# Altium PCB DWS-2_Main_Board.PcbDoc
Units mm, origin at the board's own origin, x right, y up, seen from the top; angles counter-clockwise.
Board outline 110 x 123 mm, 2 copper layers (Top Layer, Bottom Layer); 73 components, 72 nets, 311 pads, 74 vias.
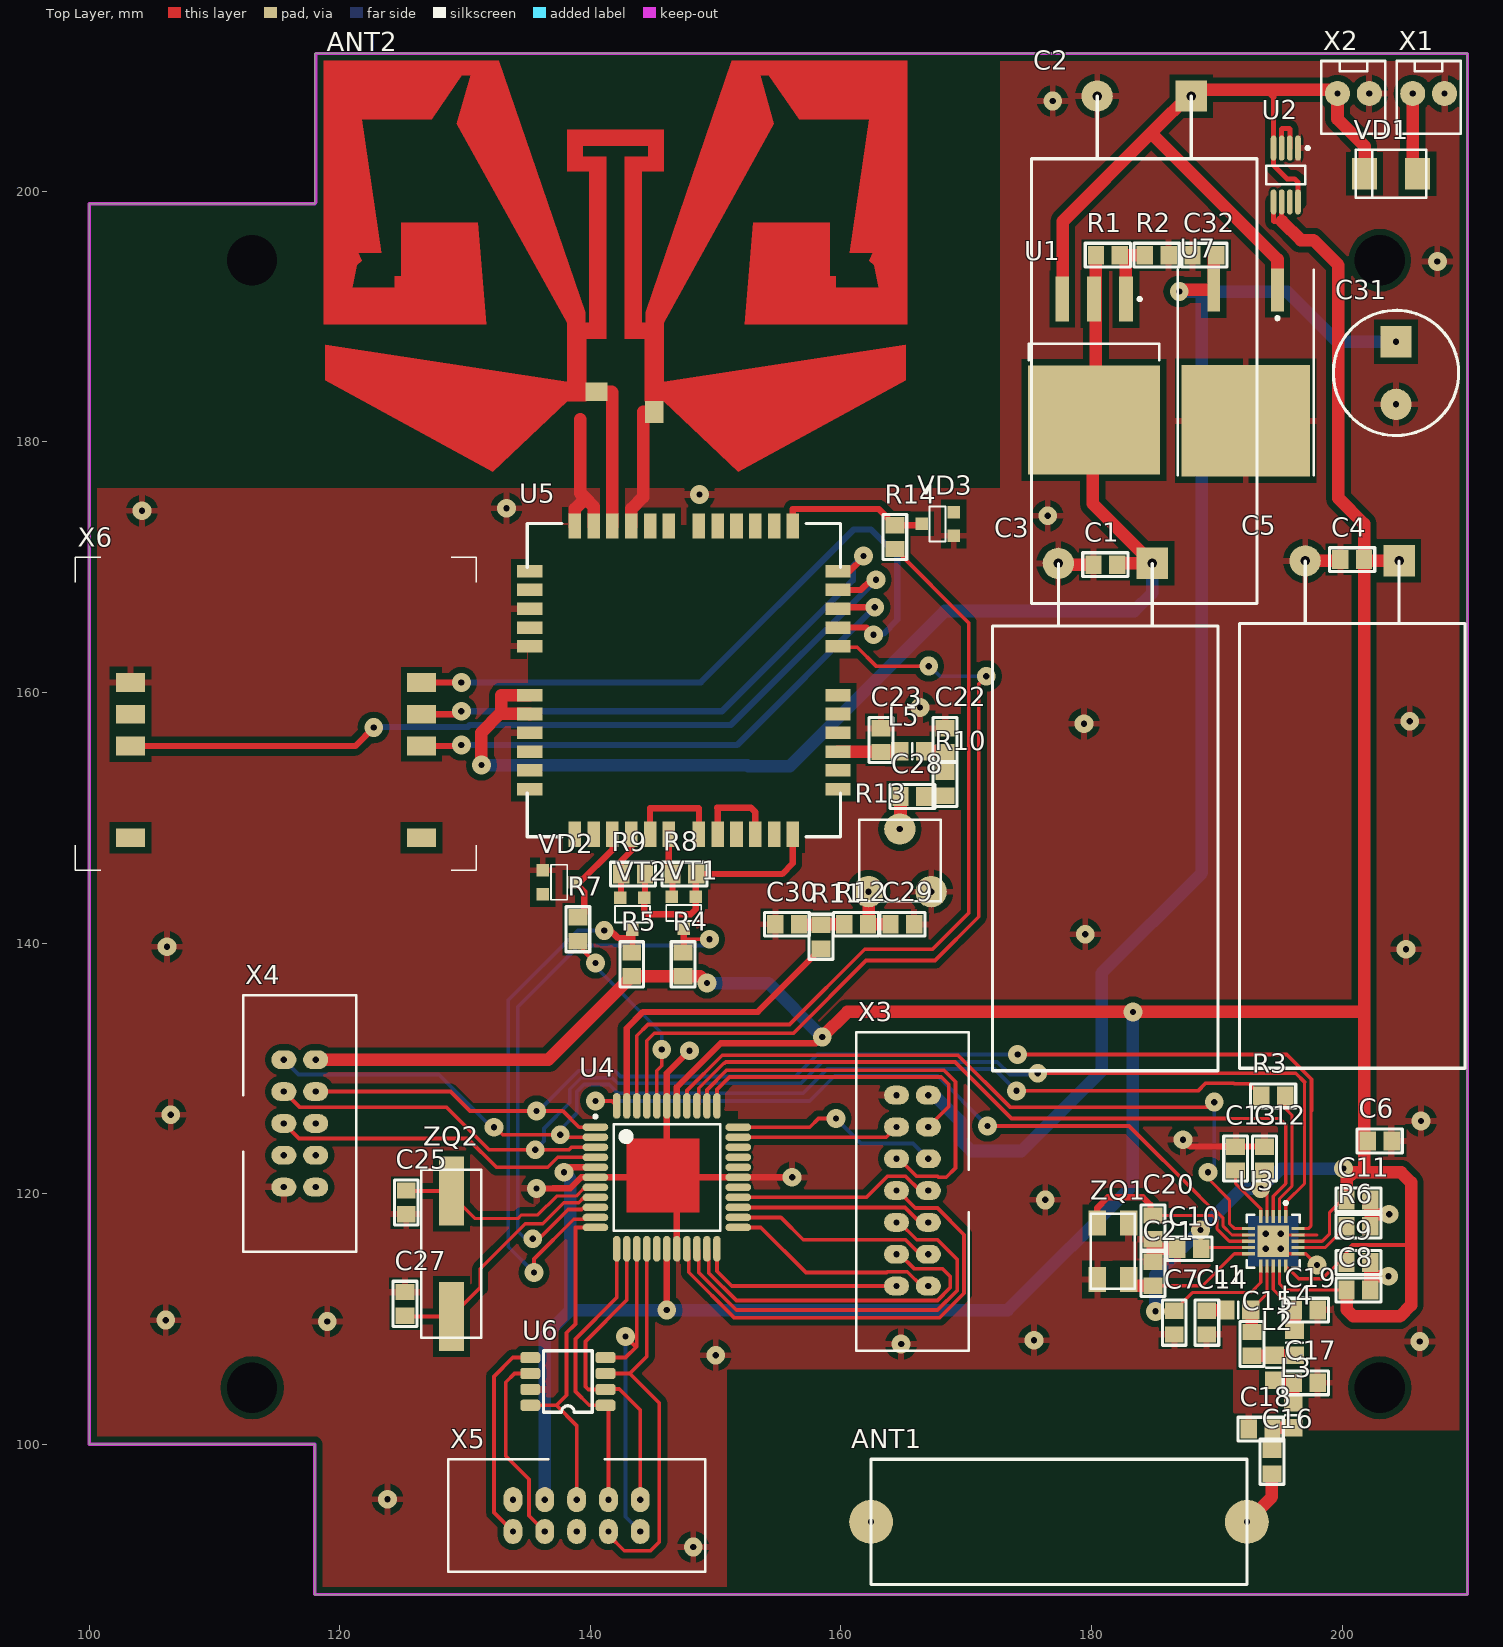
[diagram p0: Top Layer view]
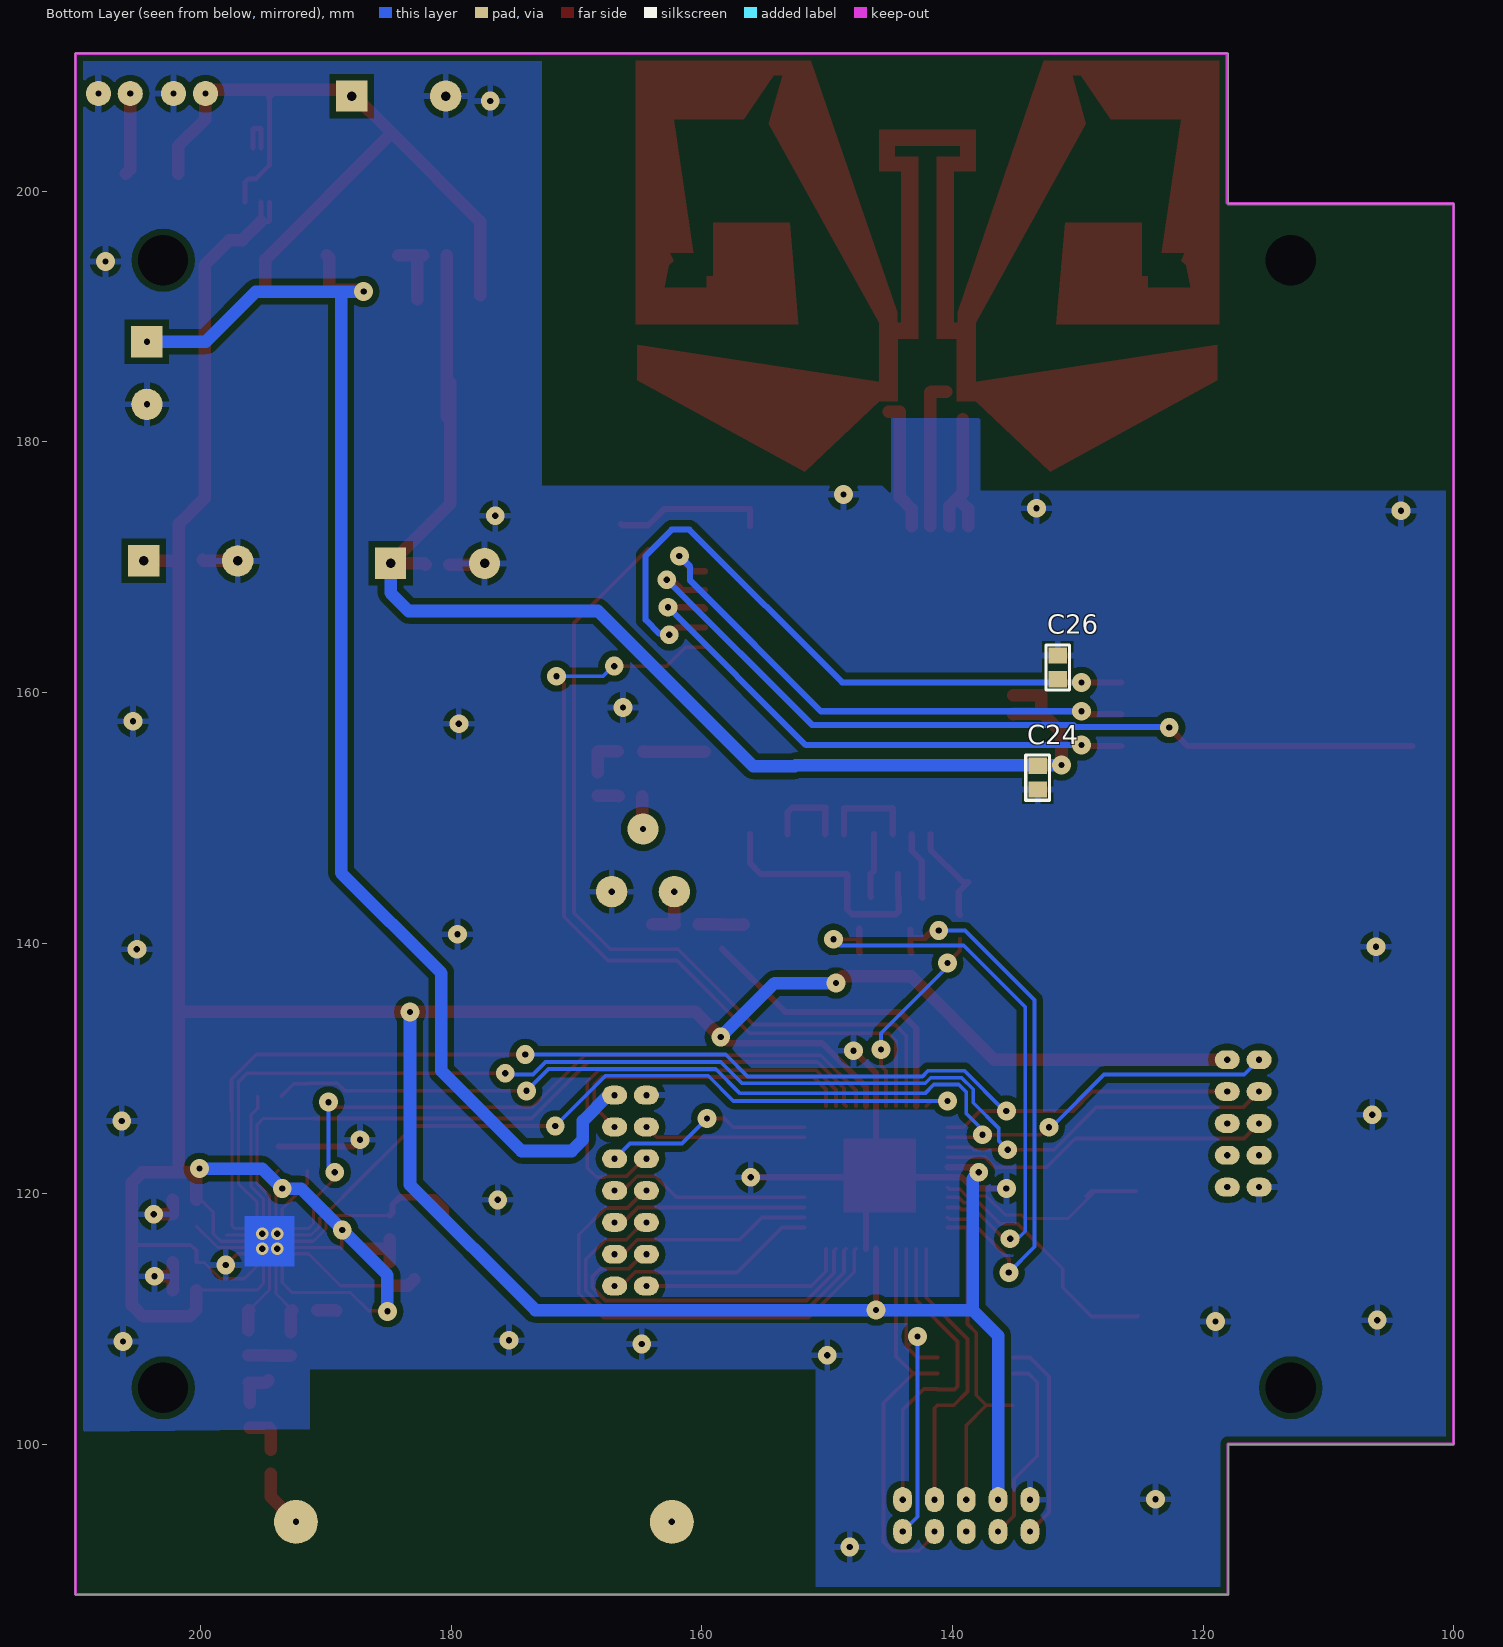
[diagram p1: Bottom Layer view, seen from below]

## Layer stack, top to bottom
Top Layer: signal copper 0.0356
Dielectric: dielectric 0.32, FR-4, Dk 4.8
Bottom Layer: signal copper 0.0356

## Board outline
100,100 100,199 118,199 118,211 210,211 210,88 118,88 118,100 100,100

## Design rules (kind name [scope] priority, off if disabled: settings)
Clearance Clearance_ANT2 [InComponent('ANT2')] p1: gap=0
Clearance "Clearance_GND_VCC +3.3" [InNet('GND') vs InNet('VCC +3.3')] p2 off: gap=0.2
Clearance Clearance_U3_Trace [(IsTrack  And IsNet)  And InRegion(3815,3770 ,4275 ,4280) vs (IsTrack  And IsNet)  And InRegion(3815,3770 ,4275 ,4280)] p3: gap=0.2
Clearance Clearance_QFP_NET [InNet('GND','NetC15_1','NetC19_1','VCC +3.3V','NetR6_2','SPI1_MOSI','SPI1_SCK','NetR3_2','GDO2','NetC13_2','GDO0','SPI_SS','NetC20_1','NetC21_1')  And InRegion(7290,4145 ,7905 ,4900) vs InNet('GND','NetC15_1','NetC19_1','VCC +3.3V','NetR6_2','SPI1_MOSI','SPI1_SCK','NetR3_2','GDO2','NetC13_2','GDO0','SPI_SS','NetC20_1','NetC21_1')  And InRegion(7290,4145 ,7905 ,4900)] p4: gap=0.2
Clearance Clearance_QFP_Pins [InComponent('U3','U4','U2') And IsPad] p5: gap=0.2
Clearance Clearance_GND [InPolygon] p6: gap=0.5
Clearance [All] p7: gap=0.25
ComponentClearance ComponentClearance_R1_C10 [InComponent('C10') vs InComponent('R1')] p1 off: gap=0 collisioncheckmode=3 verticalgap=0 showdistances=FALSE
ComponentClearance [All] p2 off: gap=0.3 collisioncheckmode=3 verticalgap=0.3 showdistances=FALSE
HoleSize [All] p1: absolutevalues=TRUE maxlimit=5 minlimit=0.3 maxpercent=80.000 minpercent=20.000
MinimumSolderMaskSliver [All] p1 off: minsoldermaskwidth=0.254
NetAntennae [All] p1: netantennaetolerance=50
PlaneConnect [All] p1: planeconnectstyle=Relief reliefexpansion=0.508 reliefentries=4 reliefconductorwidth=0.3 reliefairgap=0.3
PolygonConnect [All] p1: connectstyle=Relief reliefconductorwidth=0.5 reliefentries=4 polygonreliefangle="90 Angle"
RoutingCorners [All] p1: cornerstyle=45-Degree minsetback=2.54 maxsetback=5
RoutingVias [All] p1: holewidth=0.5 width=1.6 viastyle="Through Hole" minholewidth=0.3 minwidth=1 maxholewidth=1 maxwidth=2
ShortCircuit ShortCircuit_ANT1 [InComponent('ANT2')] p1: allowed=TRUE
ShortCircuit [All] p2: allowed=FALSE
SilkToSilkClearance [All] p1 off: silktosilkclearance=0.3
SilkscreenOverComponentPads [All] p1 off: minsilkscreentomaskgap=0.254
SolderMaskExpansion [All] p1: expansion=0.102
Width [All] p1: maxlimit=5 minlimit=0.2 preferedwidth=0.3
19 further rules are at their usual default settings.

## Components (designator, comment, footprint, x,y, rotation, side; value= is the part's Value field where it differs from the comment)
ANT1 "SPIRAL_433MHz" ANT_433MHz_SPIRAL 177.4,93.8 r180 top
ANT2 "ANT-GSM900/1800" ANT-GSM 140.5,184 r0 top
C1 "KONDENS_SMD" C0805 181.1,170.2 r180 top
C2 "K50-35" CAP_POL_D18-Horizontal 184.2,207.6 r270 top
C3 "K50-35" CAP_POL_D18-Horizontal 181.1,170.3 r270 top
C4 "KONDENS_SMD" C0805 200.8,170.6 r180 top
C5 "K50-35" CAP_POL_D18-Horizontal 200.8,170.5 r270 top
C6 "KONDENS_SMD" C0805 203,124.2 r180 top
C7 "KONDENS_SMD" C0805 186.6,109.7 r90 top
C8 "KONDENS_SMD" C0805 201.3,112.3 r180 top
C9 "KONDENS_SMD" C0805 201.3,114.5 r180 top
C10 "KONDENS_SMD" C0805 187.8,115.6 r0 top
C11 "KONDENS_SMD" C0805 201.3,119.5 r180 top
C12 "KONDENS_SMD" C0805 193.8,122.8 r270 top
C13 "KONDENS_SMD" C0805 191.5,122.8 r270 top
C14 "KONDENS_SMD" C0805 189.2,109.7 r270 top
C15 "KONDENS_SMD" C0805 192.8,108 r270 top
C16 "KONDENS_SMD" C0805 194.4,98.6 r90 top
C17 "KONDENS_SMD" C0805 197.1,104.9 r0 top
C18 "KONDENS_SMD" C0805 193.5,101.2 r180 top
C19 "KONDENS_SMD" C0805 197.1,110.7 r0 top
C20 "KONDENS_SMD" C0805 184.9,117.3 r270 top
C21 "KONDENS_SMD" C0805 184.9,113.6 r90 top
C22 "KONDENS_SMD" C0805 168.3,156.2 r90 top
C23 "KONDENS_SMD" C0805 163.2,156.2 r90 top
C24 "KONDENS_SMD" C0805 133.2,153.2 r270 bottom
C25 "KONDENS_SMD" C0805 125.3,119.3 r90 top
C26 "KONDENS_SMD" C0805 131.6,162 r270 bottom
C27 "KONDENS_SMD" C0805 125.2,111.2 r270 top
C28 "KONDENS_SMD" C0805 165.7,151.7 r180 top
C29 "KONDENS_SMD" C0805 164.9,141.5 r0 top
C30 "KONDENS_SMD" C0805 155.7,141.5 r180 top
C31 "K50-35" CAP_POL_D10 204.3,185.5 r270 top
C32 "KONDENS_SMD" C0805 189,194.9 r180 top
L1 "SMD_0805" 6-0805_M 191.7,110.7 r180 top
L2 "SMD_0805" 6-0805_M 194.6,106.1 r270 top
L3 "SMD_0805" 6-0805_M 196.1,102.3 r270 top
L4 "SMD_0805" 6-0805_M 196.2,108.1 r270 top
L5 "SMD_0805" 6-0805_M 165.7,155.3 r180 top
R1 "RES" C0805 181.3,194.9 r180 top
R2 "RES" C0805 185.2,194.9 r180 top
R3 "RES" C0805 194.5,127.8 r0 top
R4 "RES" C0805 147.4,138.3 r90 top
R5 "RES" C0805 143.3,138.3 r90 top
R6 "RES" C0805 201.3,117.4 r180 top
R7 "RES" C0805 139,141.1 r270 top
R8 "RES" C0805 147.5,145.5 r180 top
R9 "RES" C0805 143.4,145.5 r180 top
R10 "RES" C0805 168.3,152.7 r90 top
R11 "RES" C0805 158.4,140.5 r270 top
R12 "RES" C0805 161.2,141.5 r0 top
R13 "CA6V" CA6V 164.7,146.6 r0 top
R14 "RES" C0805 164.3,172.4 r90 top
U1 "LM1086IS-ADJ/NOPB" TS3B_M 180.2,185.3 r270 top
U2 "LP2986IMM-3.3" MUA08A_M 195.5,201.3 r270 top
U3 "CC1101" VQFN20 194.5,116.2 r270 top
U4 "ATmega164A-AU" 44A_M 146.1,121.3 r0 top
U5 "WISMO 228" WISMO 159.8,152.3 r180 top
U6 "AT45DB081D" SOIC-8 141.2,103.1 r180 top
U7 "L7805CD2T" TO-263 192.3,186.9 r180 top
VD1 "10BQ100" SMB 203.9,201.4 r0 top
VD2 "BZX84C2V7" SOT23 136.2,145.8 r270 top
VD3 "BZX84C2V7" SOT23 169,172.5 r90 top
VT1 "BSS138-SOT23" SOT23 148.4,143.7 r180 top
VT2 "BSS138-SOT23" SOT23 144.3,143.6 r180 top
X1 "WF 02M" "WF 02M" 206.9,207.8 r0 top
X2 "WF 02M" "WF 02M" 200.9,207.8 r0 top
X3 "IDC-14M" IDC-14M 165.7,120.3 r180 top
X4 "IDC-10M" IDC-10M 116.8,125.6 r0 top
X5 "IDC-10M" IDC-10M 138.9,94.3 r270 top
X6 "MOLEX91228-0001" MOLEX91228-0001 126.9,160.8 r180 top
ZQ1 "SMD0603" Quartz_SMD0603 181.7,115.4 r270 top
ZQ2 "HC-49SMD" HC-49SMD 128.9,115.2 r270 top

## Footprints (in the part's own frame and the unit in brackets; to place one, negate y for a bottom-side part, rotate by r counter-clockwise, add the part's x,y. Pads: shape width x height; smd on the part's side, far side on the other; paste and mask are expansions set on the pad)
6-0805_M [mm] "Chip Resistor, Body 2.0x1.2mm, IPC Low Density"
  rect 1.4x1.5 smd: 1(-1,0) 2(1,0)
  silkscreen extent 0,-0.65 0,0.65, body extent -1.07,-0.7 1.07,0.7, height 0.7
44A_M [mm] "Thin QFP, 44-Leads, Body 10x10mm, Pitch 0.8mm, IPC Low Density"
  oval 2.05x0.6 smd: 1(-5.7,4) 2(-5.7,3.2) 3(-5.7,2.4) 4(-5.7,1.6) 5(-5.7,0.8) 6(-5.7,0) 7(-5.7,-0.8) 8(-5.7,-1.6) 9(-5.7,-2.4) 10(-5.7,-3.2) 11(-5.7,-4) 23(5.7,-4) 24(5.7,-3.2) 25(5.7,-2.4) 26(5.7,-1.6) 27(5.7,-0.8) 28(5.7,0) 29(5.7,0.8) 30(5.7,1.6) 31(5.7,2.4) 32(5.7,3.2) 33(5.7,4)
  oval 0.6x2.05 smd: 12(-4,-5.7) 13(-3.2,-5.7) 14(-2.4,-5.7) 15(-1.6,-5.7) 16(-0.8,-5.7) 17(0,-5.7) 18(0.8,-5.7) 19(1.6,-5.7) 20(2.4,-5.7) 21(3.2,-5.7) 22(4,-5.7) 34(4,5.7) 35(3.2,5.7) 36(2.4,5.7) 37(1.6,5.7) 38(0.8,5.7) 39(0,5.7) 40(-0.8,5.7) 41(-1.6,5.7) 42(-2.4,5.7) 43(-3.2,5.7) 44(-4,5.7)
  silkscreen extent -5.82,-4.25 4.25,4.97, body extent -5,-5 5,5, height 1.2
ANT-GSM [mm]
  rect 1.75x1.45 smd: 1(0,0)
  rect 1.45x1.75 smd: 2(4.6,-1.6)
  Top Layer region: -2.35,5.5 -2.35,-0.75 -0.85,-0.75 -0.85,4.25 0.75,4.25 0.75,18.75 -1.1,18.75 -1.1,19.65 1.25,19.65 4.1,19.65 4.1,18.75 2.25,18.75 2.25,4.25 3.85,4.25 3.85,-0.75 5.35,-0.75 5.35,5.5 3.6,5.5 3.6,17.6 5.35,17.6 5.35,17.65 5.35,17.9 5.35,18.85 5.35,19.35 5.35,19.85 5.35,20.9 -2.35,20.9 -2.35,17.6 -0.6,17.6 -0.6,5.5
  Top Layer region: 24.65,0.9 24.65,3.75 5.35,0.8 5.35,-0.75 11.3,-6.4
  Top Layer region: -8.3,-6.4 -2.35,-0.75 -2.35,0.8 -21.65,3.75 -21.65,0.9
  Top Layer region: 24.8,26.4 10.8,26.4 3.9,6.35 3.9,5.5 5.35,5.5 5.55,5.85 14.15,21.4 13.05,25.25 13.75,25.25 16.15,21.75 21.75,21.75 20.2,11.1 22.05,11.1 21.75,10.45 22.15,10.1 22.5,8.3 19.1,8.3 19.1,9.2 18.6,9.2 18.6,13.5 12.5,13.5 11.8,5.4 24.8,5.4
  Top Layer region: -21.8,5.4 -8.8,5.4 -9.5,13.5 -15.6,13.5 -15.6,9.2 -16.1,9.2 -16.1,8.3 -19.5,8.3 -19.15,10.1 -18.75,10.45 -19.05,11.1 -17.2,11.1 -18.75,21.75 -13.15,21.75 -10.75,25.25 -10.05,25.25 -11.15,21.4 -2.55,5.85 -2.35,5.5 -0.9,5.5 -0.9,6.35 -7.8,26.4 -21.8,26.4
ANT_433MHz_SPIRAL [mm]
  round 3.5 hole 0.5: 1(-15,0) 2(15,0)
  silkscreen extent -15,-5 15,5
C0805 [mm]
  rect 1.3x1.5 smd: 1(-0.95,0) 2(0.95,0)
  silkscreen extent -1.8,-0.95 1.8,0.95
CA6V [mm]
  round 2.5 hole 0.5: 1(-2.5,-2.5) 2(2.5,-2.5) 3(0,2.5)
  silkscreen extent -3.25,-3.25 3.25,3.25
CAP_POL_D10 [mm]
  rect 2.5x2.5 hole 0.5: 1(-2.5,0)
  round 2.5 hole 0.5: 2(2.5,0)
  silkscreen extent -5,-5 5,5, body extent -4.96,-4.99 5,4.99, height 20
CAP_POL_D18-Horizontal [mm]
  rect 2.5x2.5 hole 0.762: 1(0,3.75)
  round 2.5 hole 0.762: 2(0,-3.75)
  silkscreen extent 0,-9 40.5,9
HC-49SMD [mm]
  rect 5.5x2 smd: 1(-5,0) 2(5,0)
  silkscreen extent -6.7,-2.4 6.7,2.4, body extent -6.7,-2.4 6.7,2.4, height 4
IDC-10M [mm]
  oval 2x1.5 hole 0.5: 1(-1.27,5.08) 2(1.27,5.08) 3(-1.27,2.54) 4(1.27,2.54) 5(-1.27,0) 6(1.27,0) 7(-1.27,-2.54) 8(1.27,-2.54) 9(-1.27,-5.08) 10(1.27,-5.08)
  silkscreen extent -4.5,-10.25 4.5,10.25
IDC-14M [mm]
  oval 2x1.5 hole 0.5: 1(-1.27,7.68) 2(1.27,7.68) 3(-1.27,5.14) 4(1.27,5.14) 5(-1.27,2.6) 6(1.27,2.6) 7(-1.27,0.06) 8(1.27,0.06) 9(-1.27,-2.48) 10(1.27,-2.48) 11(-1.27,-5.02) 12(1.27,-5.02) 13(-1.27,-7.56) 14(1.27,-7.56)
  silkscreen extent -4.5,-12.58 4.5,12.85
MOLEX91228-0001 [mm]
  rect 2.3x1.5 smd: 1(0.38,0) 2(0.38,2.54) 3(0.38,5.08) 4(23.6,0) 5(23.6,2.54) 6(23.6,5.08) 7(23.6,12.4) 8(0.38,12.4)
  silkscreen extent -4,-10 28,15
MUA08A_M [mm] "TSOP, 8-Leads, Body 3x3mm, Pitch 0.65mm, IPC Low Density"
  oval 2x0.45 smd: 1(-2.15,0.975) 2(-2.15,0.325) 3(-2.15,-0.325) 4(-2.15,-0.975) 5(2.15,-0.975) 6(2.15,-0.325) 7(2.15,0.325) 8(2.15,0.975)
  silkscreen extent -2.27,-1.55 0.75,1.88, body extent -1.6,-1.6 1.6,1.6, height 1.09
Quartz_SMD0603 [mm]
  rect 2x1.4 smd: 1(-2.25,-1.25) 2(2.25,-1.25) 3(2.25,1.25) 4(-2.25,1.25)
  silkscreen extent -3,-1.75 3,1.75
SMB [mm]
  rect 2x2.5 smd: 1(-2.1,0) 2(2.1,0)
  silkscreen extent -2.8,-1.9 2.8,1.9
SOIC-8 [mm]
  rrect50% 1.6x0.9 smd: 1(0,0) 2(0,-1.27) 3(0,-2.54) 4(0,-3.81) 5(6,-3.81) 6(6,-2.54) 7(6,-1.27) 8(6,0)
  silkscreen extent 1.05,-4.36 4.95,0.55
SOT23 [mm]
  rect 1x1 smd: 1(0,0) 2(1.9,0) 3(0.95,2.55)
  silkscreen extent -0.45,0.65 2.35,1.95
TO-263 [mm] "D2-PAK/TO-263-AB; 3 Leads (1 Cropped); Body 15.9 (inc. leads) x 10.4 mm (LxW max)"
  rect 1x3.4 smd: 1(-2.54,-5.225) 3(2.54,-5.225)
  rect 10.25x8.9 smd: 4(0,5.225)
  silkscreen extent -5.43,-6.83 5.43,9.57
TS3B_M [mm] "D2-PAK, 4-Leads, Body 8.6x10.2mm, Pitch 2.54mm, Lead Span 14.2mm, IPC Low Density"
  rect 3.6x1.1 smd: 1(-6.1,2.54) 2(-6.1,0) 3(-6.1,-2.54)
  rect 8.7x10.55 smd: 4(3.55,0)
  silkscreen extent -6.22,-5.2 -1.2,5.2, body extent -2.55,-5.2 6.34,5.2, height 4.64
VQFN20 [mm] "QFN, 20-Leads, Body 4,2x4,2mm (max), Pitch 0,50mm, IPC Low Density"
  rect 1.05x0.25 smd: 1(-1.975,1) 2(-1.975,0.5) 3(-1.975,0) 4(-1.975,-0.5) 5(-1.975,-1) 11(1.975,-1) 12(1.975,-0.5) 13(1.975,0) 14(1.975,0.5) 15(1.975,1)
  rect 0.25x1.05 smd: 6(-1,-1.975) 7(-0.5,-1.975) 8(0,-1.975) 9(0.5,-1.975) 10(1,-1.975) 16(1,1.975) 17(0.5,1.975) 18(0,1.975) 19(-0.5,1.975) 20(-1,1.975)
  rect 2.5x2.5 smd: 21(0,0)
  silkscreen extent -3.17,-2.1 2.1,2.1, body extent -2.07,-2.07 2.07,2.07, height 0.8
"WF 02M" [mm]
  round 2 hole 0.5: 1(-1.27,0) 2(1.27,0)
  silkscreen extent -2.56,-3.2 2.56,2.6
WISMO [mm]
  rect 2x1 smd: 1(0.04,0.02) 2(0.04,-1.48) 3(0.04,-2.98) 4(0.04,-4.48) 5(0.04,-5.98) 6(0.04,-7.48) 7(0.04,-11.38) 8(0.04,-12.88) 9(0.04,-14.38) 10(0.04,-15.88) 11(0.04,-17.38) 24(24.64,-17.38) 25(24.64,-15.88) 26(24.64,-14.38) 27(24.64,-12.88) 28(24.64,-11.38) 29(24.64,-7.48) 30(24.64,-5.98) 31(24.64,-4.48) 32(24.64,-2.98) 33(24.64,-1.48) 34(24.64,0.02)
  rect 1x2 smd: 12(3.64,-20.98) 13(5.14,-20.98) 14(6.64,-20.98) 15(8.14,-20.98) 16(9.64,-20.98) 17(11.14,-20.98) 18(13.54,-20.98) 19(15.04,-20.98) 20(16.54,-20.98) 21(18.04,-20.98) 22(19.54,-20.98) 23(21.04,-20.98) 35(21.04,3.62) 36(19.54,3.62) 37(18.04,3.62) 38(16.54,3.62) 39(15.04,3.62) 40(13.54,3.62) 41(11.14,3.62) 42(9.64,3.62) 43(8.14,3.62) 44(6.64,3.62) 45(5.14,3.62) 46(3.64,3.62)
  silkscreen extent -0.16,-21.18 24.84,3.82, body extent -0.1,-21.2 24.8,3.8, height 2.8

## Part data
ANT1: library part ANT_433MHz_SPIRAL
C2 C3 C5: library part "Capasitor _pol D18"
C31: library part "Capasitor_pol D10"
L1 L2 L3 L4 L5: library part Induktor_0805
R1 R2 R3 R4 R5 R6 R7 R8 R9 R10 R11 R12 R14: "Resistor"
R13: library part Resistor_podstr
U1: "1.5A Low Dropout Positive Regulators, 3-pin TO-263, Pb-Free"
U2: "Micropower, 200 mA Ultra Low-Dropout Fixed or Adjustable Voltage Regulator, 8-pin Mini SOIC"
U4: "8-bit AVR Microcontroller, 16KB Flash, 512 Bytes EEPROM, 1KB SRAM, 44-pin TQFP, Industrial Grade (-40°C to 85°C)"
U7: "Positive Voltage Regulator"
ZQ1: library part Quartz_SMD0603

## Free pads (board coordinates)
  round 0 hole 4 unplated: 0(113,104.5) 1(113,194.5) 2(203,194.5) 3(203,104.5)

## Via types
v1: diameter 1.5, hole 0.5, Top Layer to Bottom Layer, 70 vias
v2: diameter 1, hole 0.5, Top Layer to Bottom Layer, tented top, 4 vias

## Nets (pads, with @x,y where several pads share a name; then routed paths per layer and width w, separated by ;. In a path a pad name is that pad's centre, name@x,y a point inside that pad or via, vN(x,y) a via of type N, cw(c..) or ccw(c..) an arc to the next point about the centre after c; other vN are vias at no path point)
DS: U4.35 X3.10 | length 34.7
  Top Layer w0.3: U4.35 149.3,128.278 150.872,129.85 168.228,129.85 169.15,128.928 169.15,122.05 168.4,121.3 167.786,121.3 167.696,121.39 166.024,121.39 164.634,122.78 X3.10
GDO0: U3.6 U4.37 | length 58.9
  Top Layer w0.25: v1(189.3,121.7) 189.3,121.2 191,119.5 191,117.614 191.414,117.2 U3.6
  Top Layer w0.3: U4.37 147.7,128.233 150.517,131.05 169.35,131.05 173.5,126.9 189.8,126.9 v1(189.8,127.3)
  Bottom Layer w0.3: v1(189.3,121.7) 189.8,122.2 v1(189.8,127.3)
GDO2: U3.3 U4.36 | length 59
  Top Layer w0.25: 191,126 195,126 195.5,125.5 195.5,120.8 194.5,119.8 U3.3
  Top Layer w0.3: U4.36 148.65,127.15 148.65,128.406 150.644,130.4 150.7,130.4 150.8,130.5 169.1,130.5 173.6,126 191,126
GND: ANT2.2 C1.2 C2.2 C3.2 C4.2 C5.2 C6.1 C7.1 C8.1 C9.1 C10.1 C11.1 C12.1 C13.1 C14.2 C17.2 C18.2 C19.2 C20.2 C21.2 C22.2 C23.2 C24.2 C25.1 C26.1 C27.1 C29.2 C30.2 C31.2 C32.2 R2.1 R6.1 R13.2 U2.1 U3.16 U3.19 U3.21 U4.6 U4.18 U4.28 U4.39 U5.20 U5.22 U5.23 U5.26 U5.28 U5.31 U6.7 U7.4 VD2.1 VD3.1 X1.2 X2.2 X3.14 X4.9 X5.9 X6.4 ZQ1.2 ZQ1.4 | length 88.2
  Top Layer w0.25: v2(195.1,115.6) 195.5,115.2 U3.16 197.1,115.2 v1(198,114.3) ; v2(195.1,116.8) 195.2,116.7 U3.19 198,116.7
  Top Layer w0.5: v1(135.7,120.4) 137.016,120.4 137.041,120.425 138.393,120.425 139.268,121.3 U4.6 146.1,121.3 ; U4.18 146.9,121.3 ; v1(147.9,131.4) 146.1,129.6 U4.39 146.1,121.3 ; v1(156.1,121.3) U4.28 146.9,121.3 ; v1(187.3,124.3) 187.85,123.75 C13.1 C12.1 ; 146.1,121.3 146.9,121.3
  Top Layer w1: U5.23 138.76,174.66 139.6,175.5 ; 139.2,181.8 139.2,175.9 139.6,175.5 ; U5.22 140.26,174.84 139.6,175.5 ; U5.20 143.26,174.66 144.2,175.6 144.2,182.4 ANT2.2 ; C3.2 177.45,170.2 C1.2 ; C21.2 184.9,115.6 ; C20.2 184.9,115.6 ; C10.1 184.9,115.6 ; C5.2 199.75,170.5 C4.2 ; C8.1@202.2,112.35 C8.1 202.25,113.4 ; C9.1 202.25,113.4 ; C11.1 202.25,118.35 v1(203.75,118.35) ; v1(203.7,113.4) 202.25,113.4
  other v1: 148.2,91.8 123.8,95.6 150,107.1 164.8,108 206.2,108.2 175.4,108.3 119,109.8 106.1,109.9 176.3,119.5 206.3,125.8 106.5,126.3 205.1,139.5 106.2,139.7 179.5,140.7 179.4,157.5 205.4,157.7 166.3,158.8 176.5,174.1 104.2,174.5 133.3,174.7 148.7,175.8 207.6,194.4 176.9,207.2
  other v2: 193.9,115.6 193.9,116.8
MEM_CS: U4.14 U6.4 X5.2 | length 28
  Top Layer w0.3: U6.4 142.81,106.91 143.7,107.8 ; v1(142.8,108.6) 143.6,107.8 143.7,107.8 ; U4.14 143.7,107.8
  Bottom Layer w0.3: v1(142.8,108.6) 142.8,94.21 X5.2
MEM_RES: U4.15 U6.3 X5.4 | length 32
  Top Layer w0.3: U6.3 143.14,105.64 ; X5.4 141.44,92.76 142.7,91.5 144.8,91.5 145.5,92.2 145.5,103.28 143.14,105.64 ; U4.15 144.5,107 143.14,105.64
NetANT1_1: ANT1.1 C16.1 | length 4.7
  Top Layer w1: ANT1.1 194.4,95.8 C16.1
NetANT2_1: ANT2.1 U5.21 | length 11.9
  Top Layer w1: ANT2.1 141.7,184 141.76,183.94 U5.21
NetC2_1: C2.1 U1.3 U2.4 U2.8 U7.1 VD1.1 X2.1 | length 66.7
  Top Layer w0.4: 194.525,207.525 U2.4 194.525,202.075 195.6,201 196.2,201 196.475,200.725 U2.8
  Top Layer w0.5: 193.95,208.1 194.525,207.525
  Top Layer w1: U1.3@177.7,191.7 177.7,197.6 184.7,204.6 ; U7.1 194.84,194.56 184.8,204.6 184.7,204.6 ; VD1.1 201.8,203.6 199.63,205.77 X2.1 199.33,208.1 193.95,208.1 188.2,208.1 184.7,204.6
NetC13_2: C13.2 U3.5 | length 4.5
  Top Layer w0.25: C13.2 191.5,120.8 193.5,118.8 U3.5
NetC14_1: C14.1 L1.2 | length 1.5
  Top Layer w1: C14.1 189.25,110.7 L1.2
NetC15_1: C15.1 L1.1 U3.12 | length 5.9
  Top Layer w0.25: L1.1 194,112 U3.12
  Top Layer w1: L1.1 192.8,110.6 C15.1
NetC15_2: C15.2 L2.1 L4.2 | length 3.4
  Top Layer w1: C15.2 194.55,107.05 L2.1 L4.2
NetC16_2: C16.2 C18.1 L3.2 | length 3.4
  Top Layer w1: C16.2 194.4,101.15 C18.1 194.55,101.3 L3.2
NetC17_1: C17.1 L2.2 L3.1 | length 3.3
  Top Layer w1: L2.2 194.8,104.9 C17.1 196.1,104.85 L3.1
NetC19_1: C19.1 L4.1 U3.13 | length 5.8
  Top Layer w0.25: U3.13 194.5,112.35 C19.1
  Top Layer w1: C19.1 196.2,110.65 L4.1
NetC20_1: C20.1 U3.8 ZQ1.1 | length 15.9
  Top Layer w0.25: C20.1 189.65,118.25 190,117.9 190,117.2 191,116.2 U3.8
  Top Layer w0.5: ZQ1.1 180.45,118.85 181.3,119.7 184.1,119.7 184.7,119.1 184.7,118.45 C20.1
NetC21_1: C21.1 U3.10 ZQ1.3 | length 10.8
  Top Layer w0.25: C21.1 188.85,112.65 191.4,115.2 U3.10
  Top Layer w1: ZQ1.3 183.45,112.65 C21.1
NetC23_1: C23.1 L5.2 U5.3 | length 5
  Top Layer w1: U5.3 163.17,155.28 C23.1 164.65,155.25 L5.2
NetC25_2: C25.2 U4.7 ZQ2.1 | length 17.9
  Top Layer w0.25: C25.2 C25.2@125.35,120.2 ; ZQ2.1@128.6,120.2 130.8,118 134.2,118 134.5,118.3 135.8,118.3 137.3,119.8 138.856,119.8 139.406,120.35
  Top Layer w0.3: C25.2@125.35,120.2 128.6,120.2 ZQ2.1 ZQ2.1@129.3,119.8 ; 139.406,120.35 140.25,120.35 U4.7
NetC26_2: C26.2 U5.8 X6.1 | length 54.5
  Top Layer w0.5: X6.1 v1(129.7,160.8) ; U5.8 162.02,165.18 v1(162.6,164.6)
  Bottom Layer w0.5: v1(129.7,160.8) 148.8,160.8 161,173 162.4,173 164.5,170.9 164.5,165.8 163.4,164.7 162.7,164.7 v1(162.6,164.6)
NetC27_2: C27.2 U4.8 ZQ2.2 | length 20
  Top Layer w0.3: C27.2 125.25,110.2 ZQ2.2 131.2,112.5 131.2,114 134.8,117.6 136.2,117.6 137.875,119.275 139.073,119.275 139.498,119.7 U4.8
NetC28_1: C28.1 R10.1 | length 1.7
  Top Layer w1: C28.1 166.7,151.75 R10.1
NetC28_2: C28.2 R13.3 | length 2.6
  Top Layer w1: R13.3 164.75,149.15 C28.2
NetC29_1: C29.1 R12.2 R13.1 | length 4.4
  Top Layer w1: R13.1 162.2,141.55 R12.2 C29.1
NetC30_1: C30.1 R11.1 R12.1 | length 3.6
  Top Layer w1: C30.1 156.7,141.45 R11.1 158.45,141.5 R12.1
NetR1_1: R1.1 R2.2 U1.1 | length 5.6
  Top Layer w1: R1.1 183,194.9 ; U1.1 182.74,194.64 183,194.9 ; R2.2 183,194.9
NetR3_2: R3.2 U3.2 | length 10.3
  Top Layer w0.25: U3.2 195,119.593 196,120.593 196,126.257 195.45,126.807 R3.2
NetR6_2: R6.2 U3.17 | length 4.6
  Top Layer w0.25: U3.17 198.65,115.7 R6.2
NetR7_1: R7.1 U5.37 VD2.3 | length 8.3
  Top Layer w0.5: R7.1@139.4,142.25 139.5,142.35 139.5,144.1 VD2.3 139.15,144.85 141.76,147.46 U5.37
NetR8_1: R8.1 R9.1 U5.46 VT1.1 VT2.1 | length 20.6
  Top Layer w0.5: R9.1 144.35,143.65 VT2.1 144.3,142.5 144.5,142.3 148,142.3 148.4,142.7 VT1.1 148.4,145.45 R8.1 155.3,145.5 156.16,146.36 U5.46
NetR8_2: R8.2 U5.40 VT1.2 | length 5.1
  Top Layer w0.5: U5.40 146.26,145.79 R8.2 146.55,143.75 VT1.2
NetR9_2: R9.2 U5.38 VT2.2 | length 5.4
  Top Layer w0.5: VT2.2 142.45,143.65 R9.2 142.45,146.55 143.26,147.36 U5.38
NetR11_2: R11.2 U4.43 | length 24.3
  Top Layer w0.5: U4.43 142.9,133.2 144.2,134.5 153.35,134.5 R11.2
NetR14_2: R14.2 U5.12 VD3.3 | length 12.2
  Top Layer w0.5: U5.12 156.16,174.64 163.01,174.64 R14.2 166.35,173.35 VD3.3
NetU2_2: U2.2 U2.3 | length 3.7
  Top Layer w0.4: U2.3 195.175,204.975 195.2,205 195.8,205 195.825,204.975 U2.2
NetU5_9: U5.9 X6.3 | length 43.8
  Top Layer w0.5: X6.3 129.62,155.72 v1(129.7,155.8) ; U5.9 159.88,166.8 v1(162.7,166.8)
  Bottom Layer w0.5: v1(129.7,155.8) 151.7,155.8 v1(162.7,166.8)
NetU5_10: U5.10 X6.6 | length 68.4
  Top Layer w0.5: X6.6 121.22,155.72 v1(122.7,157.2) ; U5.10 161.58,168.18 162.4,169 v1(162.8,169)
  Bottom Layer w0.5: v1(122.7,157.2) 122.75,157.25 130.218,157.25 130.368,157.4 151.2,157.4 v1(162.8,169)
NetU5_11: U5.11 X6.2 | length 43.8
  Top Layer w0.5: X6.2 129.46,158.26 v1(129.7,158.5) ; U5.11 160.68,169.68 161.8,170.8 v1(161.8,170.9)
  Bottom Layer w0.5: v1(129.7,158.5) 150.5,158.5 160.95,168.95 160.95,170.05 v1(161.8,170.9)
NetU5_39: U5.39 U5.41 | length 8
  Top Layer w0.5: U5.39 144.76,150.76 148.64,150.76 148.66,150.74 U5.41
NetU5_42: U5.42 U5.44 | length 7.1
  Top Layer w0.5: U5.42 150.16,150.74 150.1,150.8 152.82,150.8 153.16,150.46 U5.44
NetU6_5: U6.5 X5.10 | length 16.5
  Top Layer w0.3: X5.10 132.3,94.55 132.3,105.407 133.803,106.91 U6.5
NetU6_6: U6.6 X5.8 | length 15.5
  Top Layer w0.3: U6.6 133.94,105.64 133.24,104.94 133.24,99.06 135.1,97.2 135.1,94.29 X5.8
NetVD1_2: VD1.2 X1.1 | length 6.6
  Top Layer w1: X1.1 205.63,201.77 VD1.2
O\E\: U4.32 X3.12 | length 13
  Top Layer w0.3: U4.32 163.61,124.5 X3.12
ON/OFF: R7.2 U4.40 | length 16.1
  Top Layer w0.3: R7.2@139.4,140.35 139.4,139.4 v1(140.4,138.4) ; U4.40 145.3,129.8 145.7,130.2 v1(145.7,131.5)
  Bottom Layer w0.3: v1(140.4,138.4) 140.4,138.099 145.7,132.799 v1(145.7,131.5)
READY: U4.41 U5.7 | length 68.1
  Top Layer w0.3: U4.41 144.5,132.2 145.1,132.8 156.2,132.8 162,138.6 167.5,138.6 171,142.1 171,160.7 v1(171.6,161.3) ; U5.7 159.84,163.6 161.3,163.6 162.8,162.1 v1(167,162.1)
  Bottom Layer w0.3: v1(167,162.1) 167.1,162.1 167.9,161.3 v1(171.6,161.3)
RESET_MCU: U4.4 X4.5 | length 26.7
  Top Layer w0.3: X4.5 116.73,124.4 130.2,124.4 132.5,122.1 136.6,122.1 137.4,122.9 U4.4
RESET_MODEM: R14.1 U4.42 | length 67.7
  Top Layer w0.3: U4.42 143.7,132.6 144.6,133.5 155.9,133.5 161.9,139.5 167.3,139.5 170.2,142.4 170.2,165.55 R14.1
RXD: R4.2 U4.9 VT1.3 | length 47.1
  Top Layer w0.3: v1(135.4,116.4) 135.9,116.4 138.225,118.725 139.301,118.725 139.476,118.9 U4.9 ; 147.45,140.4 147.55,140.3 v1(149.5,140.3)
  Top Layer w0.5: R4.2 147.45,139.3 147.45,140.4 VT1.3
  Bottom Layer w0.3: v1(135.4,116.4) 134.8,116.4 134.2,117 134.2,134.9 139.1,139.8 149.1,139.8 149.6,140.3 v1(149.5,140.3)
S1: U4.19 X3.8 | length 37.8
  Top Layer w0.3: U4.19 147.85,115.45 147.85,113.717 151.467,110.1 167.882,110.1 169.826,112.044 169.826,116.72 167.696,118.85 165.934,118.85 164.544,120.24 X3.8
S2: U4.20 X3.6 | length 33
  Top Layer w0.3: U4.20 148.65,115.45 148.65,113.694 151.644,110.7 167.704,110.7 169.276,112.272 169.276,114.73 167.696,116.31 166.043,116.31 164.653,117.7 X3.6
S3: U4.21 X3.4 | length 28.5
  Top Layer w0.3: U4.21 149.45,115.45 149.45,113.672 151.652,111.47 167.696,111.47 168.726,112.5 168.726,113.374 168.09,114.01 165.829,114.01 164.679,115.16 X3.4
S4: U4.22 X3.2 | length 16.6
  Top Layer w0.3: U4.22 150.1,113.8 151.28,112.62 X3.2
S5: U4.23 X3.1 | length 17.2
  Top Layer w0.3: U4.23 153.6,117.3 157.2,113.7 163.634,113.7 163.704,113.77 165.291,113.77 166.441,112.62 X3.1
S6: U4.24 X3.3 | length 16.4
  Top Layer w0.3: U4.24 155.2,118.1 156.99,116.31 165.156,116.31 166.306,115.16 X3.3
S7: U4.25 X3.5 | length 15.7
  Top Layer w0.3: U4.25 165.106,118.9 166.306,117.7 X3.5
S8: U4.26 X3.7 | length 16.3
  Top Layer w0.3: U4.26 162.014,119.7 163.704,121.39 165.156,121.39 166.306,120.24 X3.7
SH: U4.34 X3.11 | length 24.5
  Top Layer w0.3: U4.34 150.1,128.3 151.1,129.3 168,129.3 168.6,128.7 168.6,126.95 X3.11
SPEAK: C22.1 L5.1 R10.2 | length 3.2
  Top Layer w1: L5.1 168.25,155.3 C22.1 R10.2
SPI1_MISO: U4.11 U6.8 X5.5 | length 26.7
  Top Layer w0.3: U6.8 137.3,103.1 ; X5.5 138.9,101.5 137.3,103.1 ; U4.11 138.8,117.3 138.8,109.6 138.1,108.9 138.1,103.9 137.3,103.1
SPI1_MOSI: U4.12 U6.1 X5.3 | length 23.3
  Top Layer w0.3: X5.3 141.44,102.86 U6.1 139.9,103.1 138.8,104.2 138.8,108.4 142.1,111.7 U4.12
SPI1_SCK: U4.13 U6.2 X5.1 | length 24.7
  Top Layer w0.3: U4.13 142.9,111.5 139.6,108.2 139.6,104.6 139.83,104.37 U6.2 141.23,104.4 142.3,104.4 143.98,102.72 X5.1
SPI_MISO: R3.1 U4.2 X4.1 | length 88.8
  Top Layer w0.3: v1(132.3,125.3) 132.4,125.3 133,124.7 v1(137.6,124.7) 137.8,124.5 U4.2 ; v1(174,128.2) 188.5,128.2 189.1,128.8 191.358,128.8 191.383,128.775 192.575,128.775 R3.1
  Bottom Layer w0.3: X4.1 116.71,129.5 127.9,129.5 132.1,125.3 v1(132.3,125.3) ; v1(137.6,124.7) 137.6,125.1 138.9,126.4 138.9,128.1 139.5,128.7 141.5,128.7 142.2,128 156.95,128 158.9,129.95 172.25,129.95 v1(174,128.2)
SPI_MOSI: U3.20 U4.1 X4.4 | length 101.3
  Top Layer w0.25: U3.20 197.3,117.2 197.5,117.4 197.5,126.6
  Top Layer w0.3: X4.4 128.838,128.14 130.378,126.6 v1(135.7,126.6) 137.8,126.6 139.1,125.3 U4.1 ; v1(174.1,131.1) 195.578,131.1 197.55,129.128 197.55,126.625 197.525,126.6
  Bottom Layer w0.3: v1(135.7,126.6) 135.844,126.6 139.044,129.8 141.956,129.8 142.406,129.35 156.35,129.35 158.1,131.1 v1(174.1,131.1)
SPI_SCK: U3.1 U4.3 X4.3 | length 104.9
  Top Layer w0.25: U3.1 195.5,119.3 197,120.8 197,128.9
  Top Layer w0.3: X4.3 116.77,126.9 128.5,126.9 131.9,123.5 v1(135.6,123.5) 138.3,123.5 138.5,123.7 U4.3 ; v1(175.7,129.6) 196.3,129.6 197,128.9
  Bottom Layer w0.3: v1(135.6,123.5) 136.3,124.2 136.3,125.2 138.35,127.25 138.35,128.328 139.272,129.25 141.728,129.25 142.178,128.8 156.8,128.8 158.5,130.5 172.478,130.5 173.478,129.5 175.6,129.5 v1(175.7,129.6)
SPI_SS: U3.7 U4.44 | length 60.4
  Top Layer w0.25: 188.6,119.8 189.65,118.75 189.786,118.75 190.5,118.036 190.5,117.407 191.207,116.7 U3.7
  Top Layer w0.3: v1(140.4,127.4) 141.7,127.4 U4.44 ; v1(171.7,125.4) 183,125.4 188.6,119.8
  Bottom Layer w0.3: v1(140.4,127.4) 157.5,127.4 159.5,129.4 167.7,129.4 v1(171.7,125.4)
ST: U4.33 X3.9 | length 16.8
  Top Layer w0.3: U4.33 157.5,125.3 158.2,126 v1(159.6,126)
  Bottom Layer w0.3: v1(159.6,126) 161.6,124 165.75,124 X3.9
TXD: R5.2 U4.10 VT2.3 | length 44.3
  Top Layer w0.3: v1(135.5,113.7) 135.5,114.778 138.672,117.95 140.25,117.95 U4.10
  Top Layer w0.5: v1(141.1,141) 141.4,141 141.5,141.1 142.2,140.4 143.35,140.4 ; R5.2 143.35,139.3 143.35,140.4 ; VT2.3 143.35,140.4
  Bottom Layer w0.3: v1(135.5,113.7) 133.45,115.75 133.45,135.45 139,141 v1(141.1,141)
"VCC +3.3V": C4.1 C5.1 C6.2 C7.2 C8.2 C9.2 C10.2 C11.2 C12.2 R4.1 R5.1 U2.5 U2.6 U3.4 U3.9 U3.11 U3.14 U3.15 U3.18 U4.5 U4.17 U4.38 X4.2 X5.7 | length 380.4
  Top Layer w0.25: v1(185.1,110.6) 185.15,110.65 C7.2 188.05,112.1 192.7,112.1 193.5,112.9 U3.11 ; v1(188.7,117.1) 188.75,117.05 C10.2 188.85,115.7 U3.9 ; v1(193.5,120.4) 193.7,120.4 v1@194,120.1 ; C12.2 194,121.65 v1@194,120.1 ; U3.4 v1@194,120.1 ; U3.14 195,112.8 195.5,112.3 C8.2 ; U3.15 196.525,113.2 198.42,113.2 199.72,114.5 C9.2 ; U3.18 198.4,116.2 199,116.8 199,118.5 200,119.5 C11.2
  Top Layer w0.3: C9.2 200.35,115.45 200.8,115.9 205.5,115.9
  Top Layer w0.4: U2.5 194.525,197.625 194.55,197.6 195.2,197.6 195.175,197.625 U2.6
  Top Layer w0.5: v1(137.9,121.7) 137.7,121.7 138.1,122.1 U4.5 ; v1(146.1,110.7) U4.17 ; U4.38 146.9,128.5 150.4,132 158,132 v1(158.5,132.5)
  Top Layer w1: X4.2 136.63,130.68 R5.1 R4.1 148.75,137.35 v1(149.3,136.8) ; v1(158.5,132.5) 160.5,134.5 v1(183.3,134.5) 201.75,134.5 ; 195.2,197.6 196.7,196.1 197.7,196.1 199.7,194.1 199.7,175.5 201.75,173.45 C4.1 ; v1(200.1,122) 200.35,121.75 200.35,121.15 ; C8.2 200.35,110.75 200.9,110.2 204.6,110.2 205.5,111.1 205.5,115.9 205.5,120.9 204.7,121.7 201.8,121.7 ; C11.2 200.35,121.15 ; C5.1 201.85,170.5 C4.1 ; 200.35,121.15 200.9,121.7 201.8,121.7 ; 201.75,134.5 201.75,121.75 201.8,121.7 ; 201.75,134.5 C4.1
  Bottom Layer w1: X5.7 136.36,108.66 138.4,110.7 ; v1(137.9,121.7) 138.4,121.199 138.4,110.7 ; v1(149.3,136.8) 154.2,136.8 v1(158.5,132.5) ; v1(183.3,134.5) 183.3,120.7 173.3,110.7 v1(146.1,110.7) 138.4,110.7 ; v1(185.1,110.6) 185.1,113.5 v1(188.7,117.1) 192,120.4 v1(193.5,120.4) 195.1,122 v1(200.1,122)
"VCC +4.2V": C1.1 C3.1 C24.1 R1.2 U1.2 U1.4 U5.29 U5.30 | length 105.1
  Top Layer w1: v1(131.3,154.2) 131.3,156.8 132.8,158.3 132.9,158.3 ; U5.30 135.14,158.3 132.9,158.3 ; U5.29 132.92,159.78 132.9,159.76 132.9,158.3 ; U1.4@180.1,184.7 U1.4@180.1,181.75 ; R1.2 180.35,182 U1.4@180.1,181.75 ; C1.1 182.15,170.3 C3.1 ; C3.1@184.75,170.2 C3.1 ; U1.4@180.1,181.75 180.1,175.05 C3.1
  Bottom Layer w1: v1(131.3,154.2) 152.5,154.2 152.6,154.1 155.9,154.1 168.3,166.5 183.4,166.5 184.85,167.95 C3.1
VCC+5V: C31.1 C32.1 U7.3 X3.13 | length 109.3
  Top Layer w1: v1(187,192) 187.125,192.125 U7.3 189.76,194.71 C32.1
  Bottom Layer w1: X3.13 167.44,127.86 169.5,125.8 169.5,124.3 170.4,123.4 174.4,123.4 180.8,129.8 180.8,137.6 188.8,145.6 188.8,192 ; v1(187,192) 188.8,192 ; C31.1 199.6,188 195.6,192 188.8,192
pads on no net: ANT1.2 U2.7 U4.16 U4.27 U4.29 U4.30 U4.31 U5.1 U5.2 U5.4 U5.5 U5.6 U5.13 U5.14 U5.15 U5.16 U5.17 U5.18 U5.19 U5.24 U5.25 U5.27 U5.32 U5.33 U5.34 U5.35 U5.36 U5.43 U5.45 VD2.2 VD3.2 X4.6 X4.7 X4.8 X4.10 X5.6 X6.5 X6.7 X6.8

## Polygon pours and split planes (outlines as drawn)
GND on Bottom Layer "Bottom Layer-No Net" (solid, remove dead copper, pour order 4): 100,176.2 100.1,176.1 137.8,176.1 137.8,181.8 137.9,181.9 144.9,181.9 144.9,176 145,175.9 145.6,176.5 172.8,176.5 172.8,211 210,211 209.9,101 191.3,101.2 191.3,106 150.9,106 150.9,88 118,88 118,100 100,100
GND on Top Layer "TOP" (solid, remove dead copper, pour order 6): 100,176.1 100.2,176.3 159.4,176.3 172.7,176.3 172.7,211 210,211 210,101.1 191.5,101.1 191.4,101.2 191.3,101.3 191.3,106 151,106 150.9,105.9 150.9,88 118,88 118,99.8 100.2,99.8 100,100 100,176

## Keep-outs
Keep-Out Layer:
  lines w0.254: 100,100 100,199 118,199 118.1,199.1 118.1,211 210,211 210,88 131.8,88 118,88 118,100 100,100

## Other copper
Top Layer:
  rectangle net GND: 142.9,118.5 148.7,124.4
  pour cut-out: 140.3,126.6 140.3,116.2 151.8,116.2 151.8,126.6
  pour cut-out: 135,173.4 159.9,173.4 159.9,148.5 135.1,148.5 135,148.6
Bottom Layer:
  rectangle net GND: 192.5,114.2 196.5,118.2